# EAGLE board SOT363-DIP (EAGLE 8.5.2)
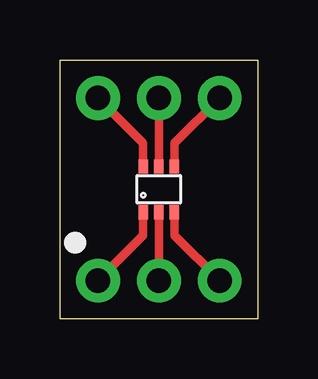
[diagram p0: board, top side]
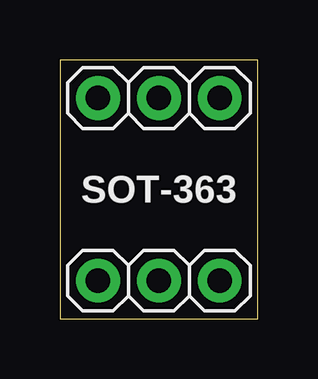
[diagram p1: board, bottom side, seen from below]

Size 8.26 x 10.79 mm. Coordinates in mm from the lower left corner, seen from the top.
Outline: 0,0 0,10.79 8.26,10.79 8.26,0 0,0
Copper layers (1*16): Top 0.035mm / dielectric 1.6mm / Bottom 0.035mm
Design rules "Elecrow_2-layer_PCB_eagle_rule *": minimum track width 6mil, minimum drill 12mil, track to track 6mil, track to pad 6mil, pad to pad 6mil, via to via 8mil, smd to smd 0mil, copper to edge 20mil, drill to drill 10mil, minimum pad ring 16mil, minimum via ring 6mil, stop-mask expansion 0mil, vias tented up to drill 100mil, thermal gap 10mil

## Footprints (pad centres in the part's own frame; a part is rotated, then mirrored left to right if it is on the bottom)
SOT363 = smd 0.4 x 0.6: 1 -0.65,-0.95; 2 0,-0.95; 3 0.65,-0.95; 4 0.65,0.95; 5 0,0.95; 6 -0.65,0.95
ADAPTER-6 = drill 1.016: 1 1.587,1.587; 2 4.128,1.587; 3 6.668,1.587; 4 6.668,9.207; 5 4.128,9.207; 6 1.587,9.207

## Placement (x,y rotation side)
Q1  2N7002DW  [SOT363]  4.13,5.4 0 top
SOT-363  ADAPTER-6  [ADAPTER-6]  0,0 0 top

## Library data of the parts
Q1 = my-mosfet
SOT-363 = my-pinhead

## Nets
N$1: Q1.3 SOT-363.3
N$2: Q1.5 SOT-363.5
N$3: Q1.1 SOT-363.1
N$4: Q1.6 SOT-363.6
N$5: Q1.2 SOT-363.2
N$6: Q1.4 SOT-363.4

## Tracks (layer width: path | path; a pad name or v marks a point on that pad's centre or on a via)
N$1
  Top 0.356: SOT-363.3 4.78,3.48 Q1.3
N$2
  Top 0.356: Q1.5 SOT-363.5
N$3
  Top 0.356: SOT-363.1 3.48,3.48 Q1.1
N$4
  Top 0.356: SOT-363.6 3.48,7.32 Q1.6
N$5
  Top 0.356: SOT-363.2 Q1.2
N$6
  Top 0.356: SOT-363.4 4.78,7.32 Q1.4